# EAGLE board Shield (EAGLE 6.5.0)
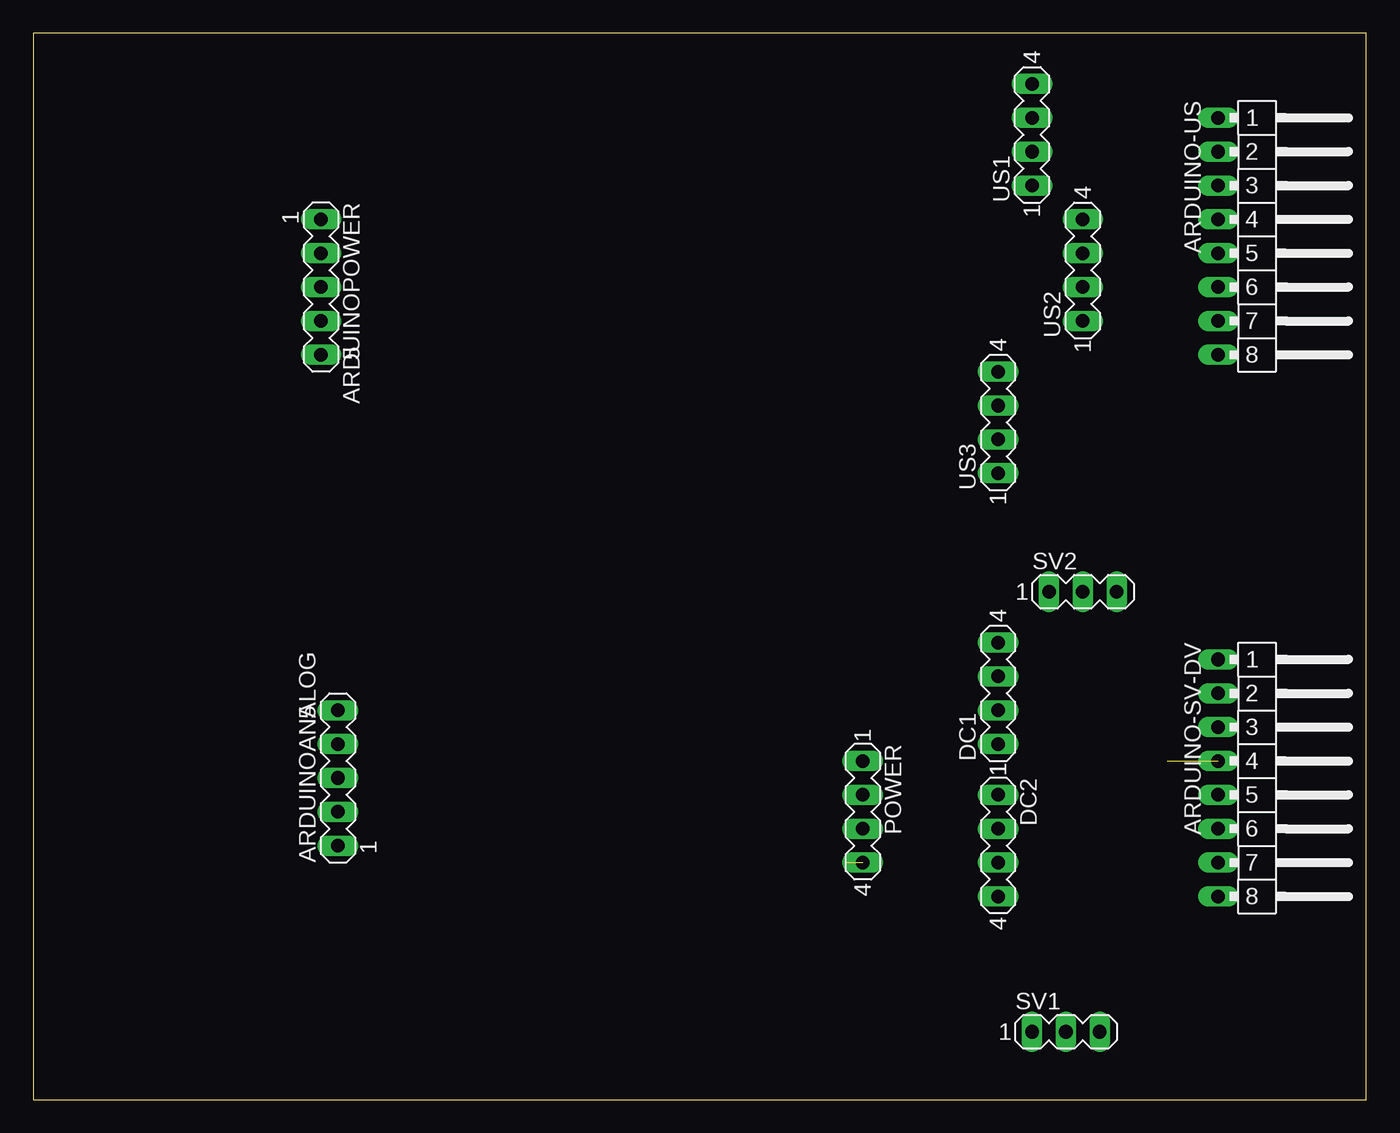
[diagram p0: board, top side]
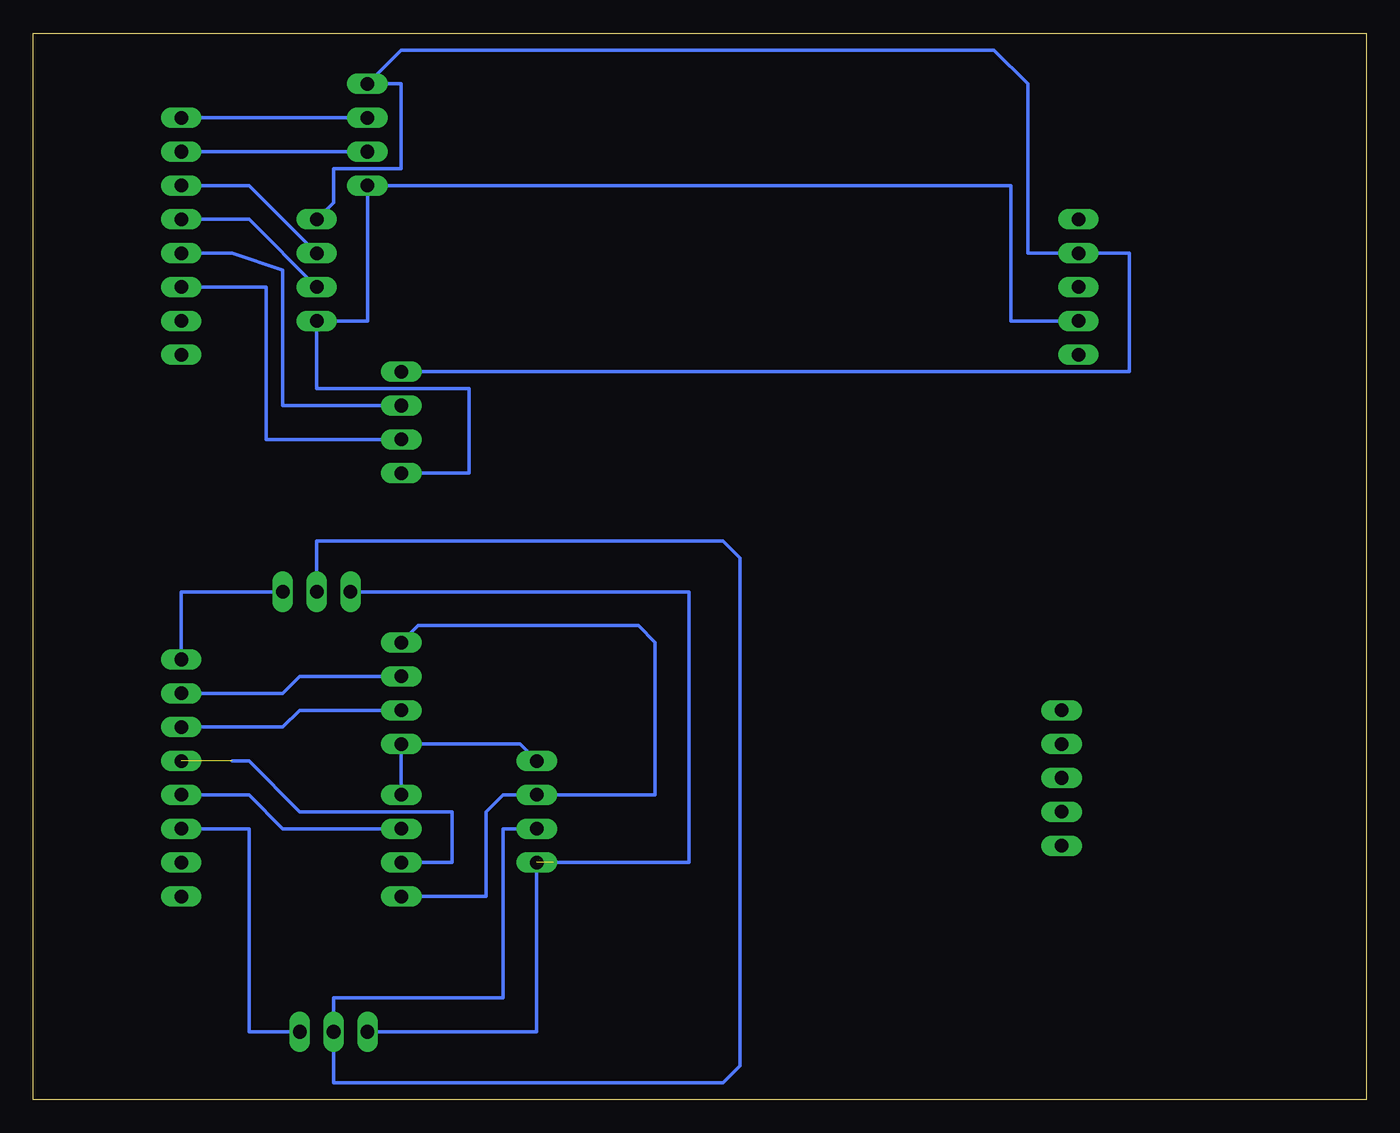
[diagram p1: board, bottom side, seen from below]

Size 100 x 80 mm. Coordinates in mm from the lower left corner, seen from the top.
Outline: 0,0 100,0 100,80 0,80 0,0
Copper layers (1*16): Top 0.035mm / dielectric 1.5mm / Bottom 0.035mm
Design rules "default": minimum track width 10mil, minimum drill 24mil, track to track 8mil, track to pad 8mil, pad to pad 8mil, via to via 8mil, smd to smd 8mil, copper to edge 40mil, drill to drill 8mil, minimum pad ring 10mil, minimum via ring 8mil, stop-mask expansion 4mil, vias tented up to drill 0mil, thermal gap 10mil

## Footprints (pad centres in the part's own frame; a part is rotated, then mirrored left to right if it is on the bottom)
MA08-1W = drill 1.016 long: 1 -8.89,0; 2 -6.35,0; 3 -3.81,0; 4 -1.27,0; 5 1.27,0; 6 3.81,0; 7 6.35,0; 8 8.89,0
MA05-1 = drill 1.016 long: 1 -5.08,0; 2 -2.54,0; 3 0,0; 4 2.54,0; 5 5.08,0
MA04-1 = drill 1.016 long: 1 -3.81,0; 2 -1.27,0; 3 1.27,0; 4 3.81,0
MA03-1 = drill 1.016 long: 1 -2.54,0; 2 0,0; 3 2.54,0

## Placement (x,y rotation side)
ARDUINO-SV-DV  [MA08-1W]  88.9,24.13 270 top
ARDUINO-US  [MA08-1W]  88.9,64.77 270 top
ARDUINOANALOG  [MA05-1]  22.86,24.13 90 top
ARDUINOPOWER  [MA05-1]  21.59,60.96 270 top
DC1  [MA04-1]  72.39,30.48 90 top
DC2  [MA04-1]  72.39,19.05 270 top
POWER  [MA04-1]  62.23,21.59 270 top
SV1  [MA03-1]  77.47,5.08 0 top
SV2  [MA03-1]  78.74,38.1 0 top
US1  [MA04-1]  74.93,72.39 90 top
US2  [MA04-1]  78.74,62.23 90 top
US3  [MA04-1]  72.39,50.8 90 top

## Library data of the parts
ARDUINO-SV-DV ARDUINO-US ARDUINOANALOG ARDUINOPOWER DC1 DC2 POWER SV1 SV2 US1-US3 = con-lstb; OC_FARNELL: unknown; OC_NEWARK: unknown

## Nets
DCG2: DC1.4 DC2.4 POWER.2
DCV2: DC1.1 DC2.1 POWER.1
N$8: ARDUINO-SV-DV.5 DC2.2
N$9: ARDUINO-SV-DV.4 DC2.3
N$15: ARDUINO-SV-DV.3 DC1.2
N$16: ARDUINO-SV-DV.2 DC1.3
N$22: ARDUINO-US.6 US3.2
N$23: ARDUINO-US.5 US3.3
N$26: ARDUINO-US.2 US1.2
N$27: ARDUINO-US.1 US1.3
N$30: ARDUINO-US.4 US2.2
N$31: ARDUINO-US.3 US2.3
SV2: POWER.4 SV1.1 SV2.1
SVGND1: POWER.3 SV1.2 SV2.2
SVPOWER: ARDUINO-SV-DV.6 SV1.3
SVPOWER2: ARDUINO-SV-DV.1 SV2.3
USG1: ARDUINOPOWER.2 US1.4 US2.4 US3.4
USP1: ARDUINOPOWER.4 US1.1 US2.1 US3.1

## Tracks (layer width: path | path; a pad name or v marks a point on that pad's centre or on a via)
DCG2
  Bottom 0.254: DC1.4 71.12,35.56 54.61,35.56 53.34,34.29 53.34,22.86 POWER.2 64.77,22.86 66.04,21.59 66.04,15.24 DC2.4
DCV2
  Bottom 0.254: POWER.1 63.5,26.67 DC1.1 DC2.1
N$8
  Bottom 0.254: DC2.2 81.28,20.32 83.82,22.86 ARDUINO-SV-DV.5
N$9  (1 unrouted)
  Bottom 0.254: DC2.3 68.58,17.78 68.58,21.59 80.01,21.59 83.82,25.4 85.09,25.4
N$15
  Bottom 0.254: DC1.2 80.01,29.21 81.28,27.94 ARDUINO-SV-DV.3
N$16
  Bottom 0.254: DC1.3 80.01,31.75 81.28,30.48 ARDUINO-SV-DV.2
N$22
  Bottom 0.254: US3.2 82.55,49.53 82.55,60.96 ARDUINO-US.6
N$23
  Bottom 0.254: US3.3 81.28,52.07 81.28,62.23 85.09,63.5 ARDUINO-US.5
N$26
  Bottom 0.254: ARDUINO-US.2 US1.2
N$27
  Bottom 0.254: US1.3 ARDUINO-US.1
N$30
  Bottom 0.254: US2.2 83.82,66.04 ARDUINO-US.4
N$31
  Bottom 0.254: US2.3 83.82,68.58 ARDUINO-US.3
SV2  (1 unrouted)
  Bottom 0.254: POWER.4 62.23,5.08 SV1.1 | SV2.1 50.8,38.1 50.8,17.78 60.96,17.78
SVGND1
  Bottom 0.254: POWER.3 64.77,20.32 64.77,7.62 77.47,7.62 SV1.2 77.47,1.27 48.26,1.27 46.99,2.54 46.99,40.64 48.26,41.91 78.74,41.91 SV2.2
SVPOWER
  Bottom 0.254: ARDUINO-SV-DV.6 83.82,20.32 83.82,5.08 SV1.3
SVPOWER2
  Bottom 0.254: ARDUINO-SV-DV.1 88.9,38.1 SV2.3
USG1
  Bottom 0.254: US3.4 17.78,54.61 17.78,63.5 ARDUINOPOWER.2 25.4,63.5 25.4,76.2 27.94,78.74 72.39,78.74 US1.4 72.39,76.2 72.39,69.85 77.47,69.85 77.47,67.31 US2.4
USP1
  Bottom 0.254: US3.1 67.31,46.99 67.31,53.34 78.74,53.34 US2.1 74.93,58.42 US1.1 26.67,68.58 26.67,58.42 ARDUINOPOWER.4